# EAGLE board amp_soha_v2 (EAGLE 6.4)
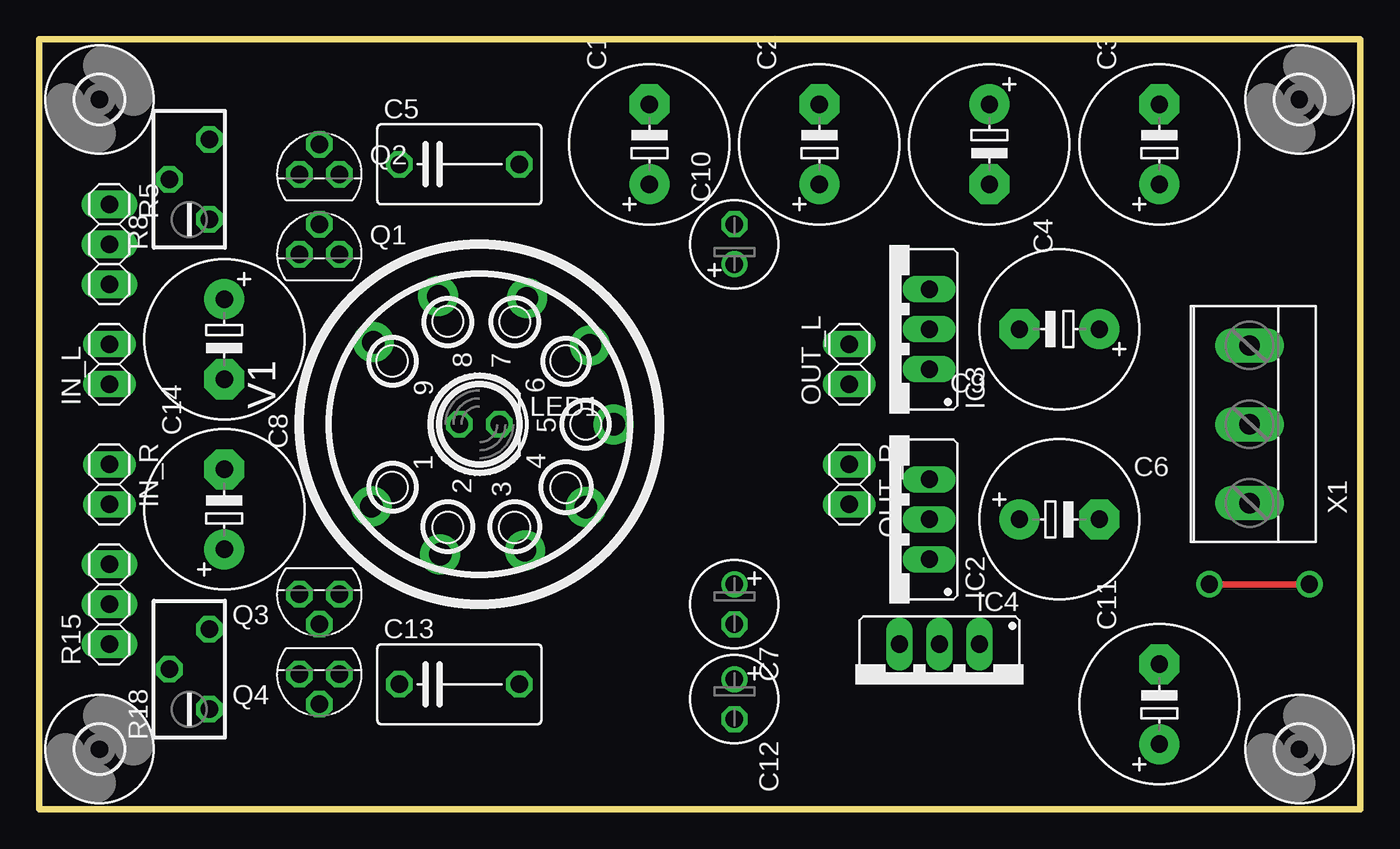
[diagram p0: board, top side]
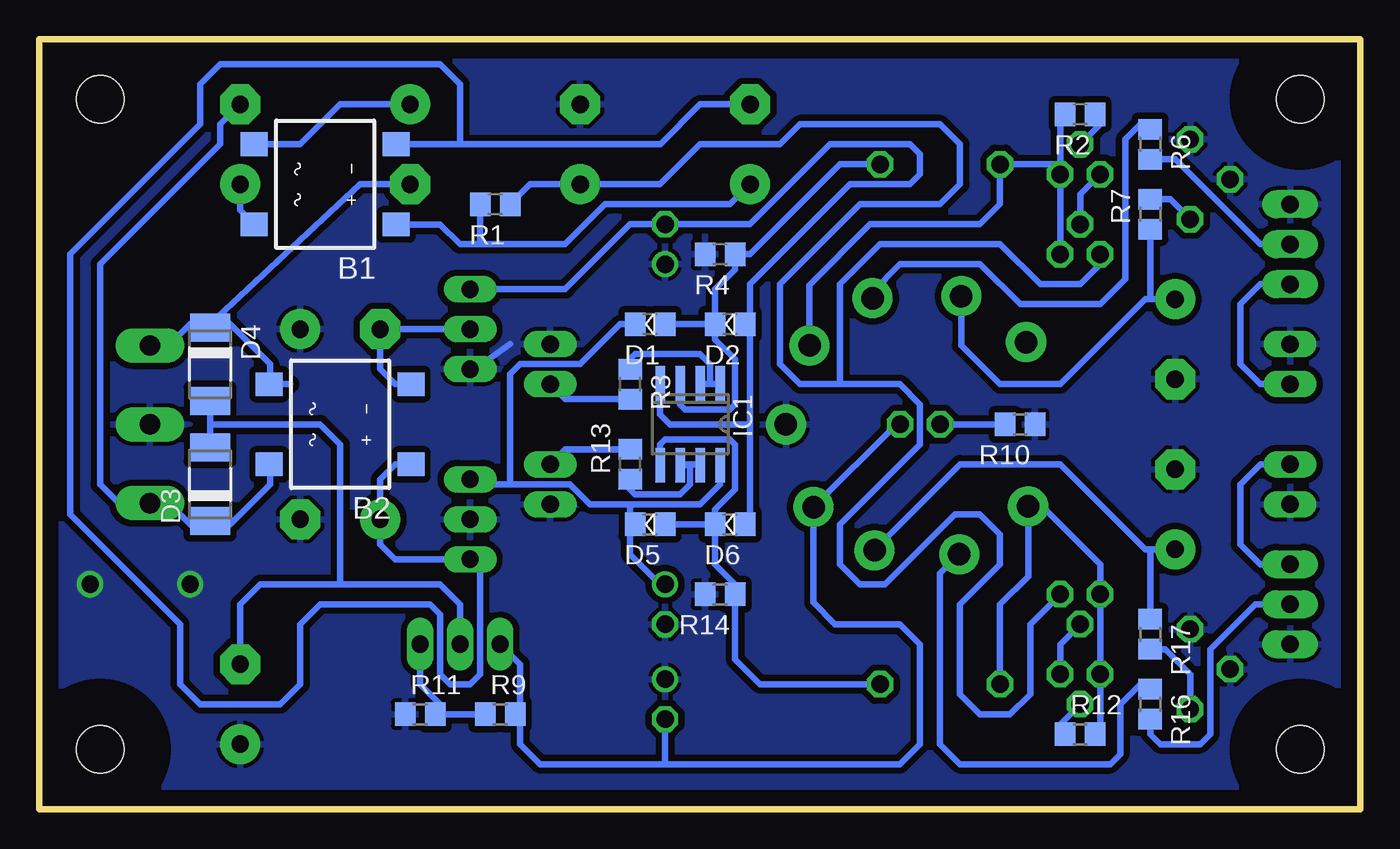
[diagram p1: board, bottom side, seen from below]

Size 83.87 x 48.89 mm. Coordinates in mm from the lower left corner, seen from the top.
Outline: 0,0 0,48.89 83.87,48.89 83.87,0 0,0
Copper layers (1*16): Top 0.035mm / dielectric 1.5mm / Bottom 0.035mm
Design rules "default": minimum track width 10mil, minimum drill 24mil, track to track 8mil, track to pad 8mil, pad to pad 8mil, via to via 8mil, smd to smd 8mil, copper to edge 40mil, drill to drill 8mil, minimum pad ring 10mil, minimum via ring 8mil, stop-mask expansion 4mil, vias tented up to drill 0mil, thermal gap 10mil

## Footprints (pad centres in the part's own frame; a part is rotated, then mirrored left to right if it is on the bottom)
DFS = smd 1.5 x 1.7: + -2.55,-4.5; - 2.55,-4.5; AC1 -2.55,4.5; AC2 2.55,4.5
E5-10,5 = drill 1.1 pad 2.54: + -2.54,0 | drill 1.1 pad 2.54 octagon: - 2.54,0
C075-052X106 = drill 1.1 pad 1.676 octagon: 1 -3.81,0; 2 3.81,0
E2,5-6 = drill 1.1: + -1.27,0 | drill 1.1 pad 1.6 octagon: - 1.27,0
D0805 = smd 1.3 x 1.5: A -0.95,0; K 0.95,0
DO-214AC = smd 1.778 x 2.54: A 2.342,0; C -2.342,0
SO08 = smd 0.6 x 2.2: 1 -1.905,-2.6; 2 -0.635,-2.6; 3 0.635,-2.6; 4 1.905,-2.6; 5 1.905,2.6; 6 0.635,2.6; 7 -0.635,2.6; 8 -1.905,2.6
78XXS = drill 1.1 pad 1.676 long: GND 0,-2.54; IN -2.54,-2.54; OUT 2.54,-2.54
79XXS = drill 1.1 pad 1.676 long: GND -2.54,-2.54; IN 0,-2.54; OUT 2.54,-2.54
337TS = drill 1.1 pad 1.676 long: 1 -2.54,-2.54; 2 0,-2.54; 3 2.54,-2.54
1X02 = drill 1.1 pad 1.676 long: 1 -1.27,0; 2 1.27,0
LED5MM = drill 1.1 pad 1.676 octagon: A -1.27,0; K 1.27,0
TO92 = drill 1.1 pad 1.676 octagon: 1 1.27,0; 2 0,1.905; 3 -1.27,0
R0805 = smd 1.3 x 1.5: 1 -0.95,0; 2 0.95,0
1X03 = drill 1.1 pad 1.778 long: 1 -2.54,0; 2 0,0; 3 2.54,0
RTRIM3296Y = drill 1.1 pad 1.676 octagon: 1 1.27,-2.54; 2 -1.27,0; 3 1.27,2.54
3,0 = hole 3: 0,0
NOVAL = drill 1.422 pad 2.54: 1 5.207,-6.858; 2 8.254,-2.484; 3 8.004,2.893; 4 5.258,6.77; 5 0,8.524; 6 -5.004,7.024; 7 -8.004,3.02; 8 -8.127,-2.611; 9 -5.207,-6.731
W237-103 = drill 1.3 pad 2.184 long: 1 -5,-1.29; 2 0,-1.29; 3 5,-1.29

## Placement (x,y rotation side)
B1  DF01S  [DFS]  65.72,39.69 90 bottom
B2  DF01S  [DFS]  64.77,24.45 90 bottom
C1  100uF/100V  [E5-10,5]  38.73,42.23 90 top
C2  100uF/100V  [E5-10,5]  49.53,42.23 90 top
C3  100uF/100V  [E5-10,5]  71.12,42.23 90 top
C4  100uF/100V  [E5-10,5]  60.33,42.23 270 top
C5  1uF/100V  [C075-052X106]  26.67,40.96 0 top
C6  470uF/35V  [E5-10,5]  64.77,18.41 0 top
C7  47uF/16V  [E2,5-6]  44.13,13.02 270 top
C8  1000uF/10V  [E5-10,5]  11.75,29.84 270 top
C9  470uF/35V  [E5-10,5]  64.77,30.48 180 top
C10  47uF/16V  [E2,5-6]  44.13,35.88 90 top
C11  470uF/35V  [E5-10,5]  71.12,6.67 90 top
C12  47uF/16V  [E2,5-6]  44.13,6.99 270 top
C13  1uF/100V  [C075-052X106]  26.67,7.94 0 top
C14  1000uF/10V  [E5-10,5]  11.75,19.05 90 top
D1  1N4148  [D0805]  45.09,30.8 180 bottom
D2  1N4148  [D0805]  40.01,30.8 180 bottom
D3  ES1  [DO-214AC]  73.02,20.64 90 bottom
D4  ES1  [DO-214AC]  73.02,28.26 270 bottom
D5  1N4148  [D0805]  45.09,18.1 180 bottom
D6  1N4148  [D0805]  40.01,18.1 180 bottom
IC1  NE5535U  [SO08]  42.55,24.45 180 bottom
IC2  7812  [78XXS]  53.98,18.41 90 top
IC3  7912  [79XXS]  53.98,30.48 90 top
IC4  [337TS]  57.15,7.94 180 top
IN_L  [1X02]  4.45,28.26 90 top
IN_R  [1X02]  4.45,20.64 270 top
LED1  [LED5MM]  27.94,24.45 0 top
OUT_L  [1X02]  51.44,28.26 90 top
OUT_R  [1X02]  51.44,20.64 270 top
Q1  J113  [TO92]  17.78,35.24 0 top
Q2  J113  [TO92]  17.78,40.32 0 top
Q3  J113  [TO92]  17.78,13.65 180 top
Q4  J113  [TO92]  17.78,8.57 180 top
R1  2k2  [R0805]  54.93,38.42 180 bottom
R2  1k5  [R0805]  17.78,44.13 180 bottom
R3  150  [R0805]  46.36,26.99 270 bottom
R4  100k  [R0805]  40.64,35.24 180 bottom
R5  100k  [1X03]  4.45,35.88 270 top
R6  300  [R0805]  13.34,42.23 270 bottom
R7  560  [R0805]  13.34,37.78 90 bottom
R8  2k  [RTRIM3296Y]  9.52,40.01 0 top
R9  1k3  [R0805]  54.61,6.03 0 bottom
R10  1k  [R0805]  21.59,24.45 180 bottom
R11  11k  [R0805]  59.69,6.03 0 bottom
R12  1k5  [R0805]  17.78,4.76 0 bottom
R13  150  [R0805]  46.36,21.91 90 bottom
R14  100k  [R0805]  40.64,13.65 180 bottom
R15  100k  [1X03]  4.45,13.02 90 top
R16  300  [R0805]  13.34,6.67 270 bottom
R17  560  [R0805]  13.34,11.11 270 bottom
R18  2k  [RTRIM3296Y]  9.52,8.89 0 top
U$1  [3,0]  3.81,3.81 0 top
U$2  [3,0]  3.81,45.09 0 top
U$3  [3,0]  80.01,3.81 0 top
U$4  [3,0]  80.01,45.09 0 top
V1  [NOVAL]  27.94,24.45 270 top
X1  [W237-103]  75.56,24.45 90 top

## Library data of the parts
B1 B2 C1-C14 D1-D6 IC1-IC4 IN_L IN_R LED1 OUT_L OUT_R Q1-Q4 R1-R18 U$1-U$4 V1 X1 = amp_soha

## Nets
+12V: C7.+ D1.K D5.K IC1.8 IC2.OUT
+24V: C2.+ Q1.3 Q3.3 R1.1
-12.6V: C12.- IC4.3 LED1.K R9.2 V1.4
-12V: C10.- D2.A D6.A IC1.4 IC3.OUT
AGND: C2.- C6.- C7.- C8.- C9.+ C10.+ C11.+ C12.+ C14.- IC2.GND IC3.GND IN_L.2 IN_R.2 OUT_L.2 OUT_R.2 R4.2 R5.1 R8.2 R8.3 R10.1 R11.1 R14.2 R15.1 R18.2 R18.3 V1.5 X1.2
N$1: B2.AC1 C3.- D3.C X1.1
N$2: B2.AC2 C4.- D4.C X1.3
N$3: C11.- D3.A D4.A IC4.2
N$4: IC4.1 R9.1 R11.2
N$5: B2.- C9.- IC3.IN
N$6: B1.- B2.+ C1.- C6.+ IC2.IN
N$7: LED1.A R10.2
N$8: B1.AC1 C3.+
N$9: B1.AC2 C4.+
N$10: R16.1 V1.2
N$11: B1.+ C1.+ R1.2
N$12: IN_L.1 R5.3
N$13: R5.2 R6.2
N$14: R6.1 V1.7
N$15: C8.+ R7.1 V1.8
N$16: Q2.2 R2.1
N$17: R7.2 R8.1
N$18: R17.2 R18.1
N$19: C5.1 Q1.1 Q2.1 R2.2 V1.6
N$20: Q1.2 Q2.3
N$22: C5.2 D1.A D2.K IC1.3 R4.1
N$24: IC1.1 IC1.2 R3.1
N$25: OUT_L.1 R3.2
N$26: IN_R.1 R15.3
N$27: R15.2 R16.2
N$29: C14.+ R17.1 V1.3
N$31: C13.1 Q3.1 Q4.1 R12.2 V1.1
N$32: Q4.2 R12.1
N$33: Q3.2 Q4.3
N$34: C13.2 D5.A D6.K IC1.5 R14.1
N$35: IC1.6 IC1.7 R13.1
N$36: OUT_R.1 R13.2

## Tracks (layer width: path | path; a pad name or v marks a point on that pad's centre or on a via)
+12V
  Bottom 0.254: 46.36,17.78 D5.K
  Bottom 0.406: D5.K 46.36,18.41 | 46.36,19.37 41.91,19.37 40.64,20.64 IC1.8 | 46.36,18.41 46.36,17.78 46.36,16.19 44.45,14.29 C7.+ | 46.36,18.41 46.36,19.37 | 53.98,20.64 50.16,20.64 48.9,19.37 46.36,19.37 | 53.98,20.64 53.98,27.62 53.34,28.26 49.53,28.26 46.99,30.8 D1.K | IC2.OUT 56.83,20.64 53.98,20.64
+24V
  Bottom 0.406: R1.1 52.7,39.69 C2.+ 44.45,39.69 41.91,42.23 36.83,42.23 35.56,43.5 26.67,43.5 25.4,42.23 25.4,39.69 26.67,38.42 31.75,38.42 36.83,33.34 36.83,28.26 35.56,26.99 33.02,26.99 | 33.02,26.99 29.21,26.99 27.94,25.72 27.94,23.18 33.02,18.1 33.02,15.56 31.75,14.29 30.16,14.29 25.72,18.73 24.13,18.73 22.86,17.46 22.86,15.56 25.4,13.02 25.4,7.3 24.13,6.03 22.23,6.03 20.96,7.3 20.96,11.75 Q3.3 | Q1.3 16.51,34.61 17.78,33.34 20.32,33.34 22.86,35.88 30.48,35.88 33.02,33.34 33.02,26.99
-12.6V
  Bottom 0.406: LED1.K 29.45,24.45 V1.4 34.71,13.12 33.34,11.75 29.21,11.75 27.94,10.48 27.94,4.13 29.21,2.86 44.13,2.86 | 44.13,2.86 52.07,2.86 53.34,4.13 53.34,5.71 R9.2 53.34,6.35 53.34,9.21 IC4.3 | C12.- 44.13,2.86
-12V
  Bottom 0.406: D6.A 38.73,18.1 38.73,24.45 | 38.73,24.45 38.73,30.48 | 38.73,30.48 D2.A 38.73,31.12 | IC1.4 44.45,25.08 43.81,24.45 38.73,24.45 | 38.73,30.48 38.73,33.34 32.38,39.69 28.57,39.69 27.94,40.32 27.94,41.59 28.57,42.23 33.66,42.23 38.73,37.15 C10.- 46.36,37.15 50.48,33.02 IC3.OUT
AGND  (via drill 1.1 pad 1.68)
  Top 0.406: v74.29,14.29 v80.64,14.29
  Bottom 0.406: IC3.GND 56.2,27.94 53.98,29.53
  pour Bottom (isolate 0.406): -0.95,-0.95 -0.95,49.85 85.09,49.85 85.09,-0.95
N$1
  Bottom 0.406: B2.AC1 69.21,21.95 69.21,20.64 71.75,18.1 71.95,18.29 D3.C 73.22,18.1 74.29,18.1 75.64,19.45 X1.1 78.82,19.45 80.01,20.64 80.01,34.61 72.39,42.23 72.39,43.5 C3.-
N$2
  Bottom 0.406: 73.02,30.8 71.75,30.8 69.21,28.26 69.21,26.94 B2.AC2 67.95,27 | C4.- 63.5,39.69 73.02,30.8 | X1.3 75.64,29.45 74.29,30.8 73.22,30.8 D4.C 73.02,30.8
N$3
  Bottom 0.406: 73.02,24.45 D3.A | D4.A 73.02,24.45 | 73.02,24.45 66.04,24.45 64.77,23.18 64.77,14.29 | 64.77,14.29 69.85,14.29 71.12,13.02 C11.- | IC4.2 57.15,13.02 58.42,14.29 64.77,14.29
N$4
  Bottom 0.406: R9.1 R11.2 58.42,6.35 58.42,6.67 59.69,7.94 IC4.1
N$5
  Bottom 0.406: IC3.IN C9.- 62.23,27.94 61.29,27 B2.-
N$6
  Bottom 0.406: B2.+ 61.29,21.9 62.23,20.95 C6.+ 62.23,16.83 61.28,15.88 IC2.IN 55.88,15.88 55.88,8.57 56.52,7.94 57.79,7.94 58.42,8.57 58.42,12.38 59.05,13.02 66.04,13.02 67.31,11.75 67.31,7.94 68.58,6.67 73.66,6.67 74.93,7.94 74.93,11.75 81.91,18.73 81.91,35.24 73.66,43.5 73.66,46.04 72.39,47.31 58.42,47.31 57.15,46.04 57.15,42.24 | B1.- 57.15,42.24 | 57.15,42.24 44.44,42.24 41.91,44.77 C1.-
N$7
  Bottom 0.406: LED1.A R10.2
N$8
  Bottom 0.406: C3.+ 71.12,38.03 B1.AC1
N$9
  Bottom 0.406: C4.+ 64.77,44.77 67.31,42.23 B1.AC2
N$10
  Bottom 0.406: V1.2 26.67,14.98 26.67,4.13 25.4,2.86 15.88,2.86 15.24,3.49 15.24,6.67 13.97,7.94 13.34,7.94 R16.1
N$11
  Bottom 0.406: B1.+ 58.41,37.14 57.15,35.88 55.88,35.88 | 55.88,35.88 50.48,35.88 47.94,38.42 40.01,38.42 C1.+ | R1.2 55.88,35.88
N$12
  Bottom 0.406: IN_L.1 6.35,26.99 7.62,28.26 7.62,32.07 6.35,33.34 R5.3
N$13
  Bottom 0.406: R6.2 11.75,41.28 6.35,35.88 R5.2
N$14
  Bottom 0.406: V1.7 30.96,32.86 29.21,34.61 24.13,34.61 21.59,32.07 16.51,32.07 14.92,33.66 14.92,42.55 13.97,43.5 13.66,43.5 R6.1
N$15
  Bottom 0.406: V1.8 25.33,29.46 22.86,26.99 19.05,26.99 13.65,32.38 13.34,32.38 | C8.+ 13.34,32.38 | R7.1 13.34,32.38
N$16
  Bottom 0.406: R2.1 16.51,44.13 16.51,43.5 Q2.2
N$17
  Bottom 0.406: R7.2 12.06,38.73 R8.1
N$18
  Bottom 0.406: R17.2 12.38,10.16 10.8,8.57 R18.1
N$19
  Bottom 0.406: Q1.1 Q2.1 19.05,40.96 | V1.6 34.96,33.3 31.12,37.15 24.13,37.15 22.86,38.42 C5.1 19.05,40.96 | 19.05,40.96 19.05,43.81 R2.2
N$20
  Bottom 0.406: Q1.2 17.78,39.05 Q2.3
N$22
  Bottom 0.254: 43.18,27.62 IC1.3
  Bottom 0.406: 43.18,27.62 43.18,25.72 42.86,25.4 40.01,25.4 39.69,25.72 39.69,28.57 40.95,29.84 D2.K | 41.27,30.48 D2.K | D1.A D2.K | C5.2 33.02,40.96 38.73,35.24 R4.1 39.69,34.29 40.96,33.02 D2.K
N$24
  Bottom 0.406: 41.27,26.99 41.27,28.26 41.91,28.89 46.04,28.89 46.36,28.57 R3.1 | IC1.2 arc-90 41.85,26.99 41.27,26.99 | 41.27,26.99 40.7,26.99 arc-90 IC1.1
N$25
  Bottom 0.406: R3.2 50.48,26.04 OUT_L.1
N$26
  Bottom 0.406: IN_R.1 6.35,21.91 7.62,20.64 7.62,16.83 6.35,15.56 R15.3
N$27
  Bottom 0.406: R16.2 13.34,4.76 12.7,4.13 10.16,4.13 9.52,4.76 9.52,10.16 6.67,13.02 R15.2
N$29
  Bottom 0.406: V1.3 30.83,16.47 25.4,21.91 19.05,21.91 13.65,16.51 13.34,16.51 | 13.34,16.51 C14.+ | R17.1 13.34,16.51
N$31
  Bottom 0.406: R12.2 16.51,4.76 Q4.1 Q3.1 16.51,15.56 20.19,19.24 V1.1 21.08,14.8 22.86,13.02 C13.1
N$32
  Bottom 0.406: R12.1 19.05,4.76 19.05,5.4 Q4.2
N$33
  Bottom 0.406: Q4.3 19.05,10.48 Q3.2
N$34
  Bottom 0.406: IC1.5 44.45,23.18 44.13,23.5 40.01,23.5 39.69,23.18 39.69,20.32 40.96,19.05 D6.K | C13.2 38.1,7.94 39.69,9.53 R14.1 39.69,14.29 40.96,15.56 D6.K | D5.A D6.K | D6.K | 41.27,18.1 D6.K
N$35
  Bottom 0.254: 41.91,21.27 IC1.7 | 43.18,21.27 IC1.6
  Bottom 0.406: 42.55,21.91 42.55,20.64 43.18,20 46.04,20 46.36,20.32 R13.1 | 42.55,21.91 43.12,21.91 IC1.6 42.61,21.85 42.55,21.91 | 42.55,21.91 41.97,21.91 IC1.7
N$36
  Bottom 0.406: R13.2 50.48,22.86 OUT_R.1